# Altium PCB drive.PcbDoc
Units mil, origin at the board's own origin, x right, y up, seen from the top; angles counter-clockwise.
Board outline 6000 x 4000 mil, 2 copper layers (Top Layer, Bottom Layer); 51 components, 40 nets, 164 pads, 61 vias.
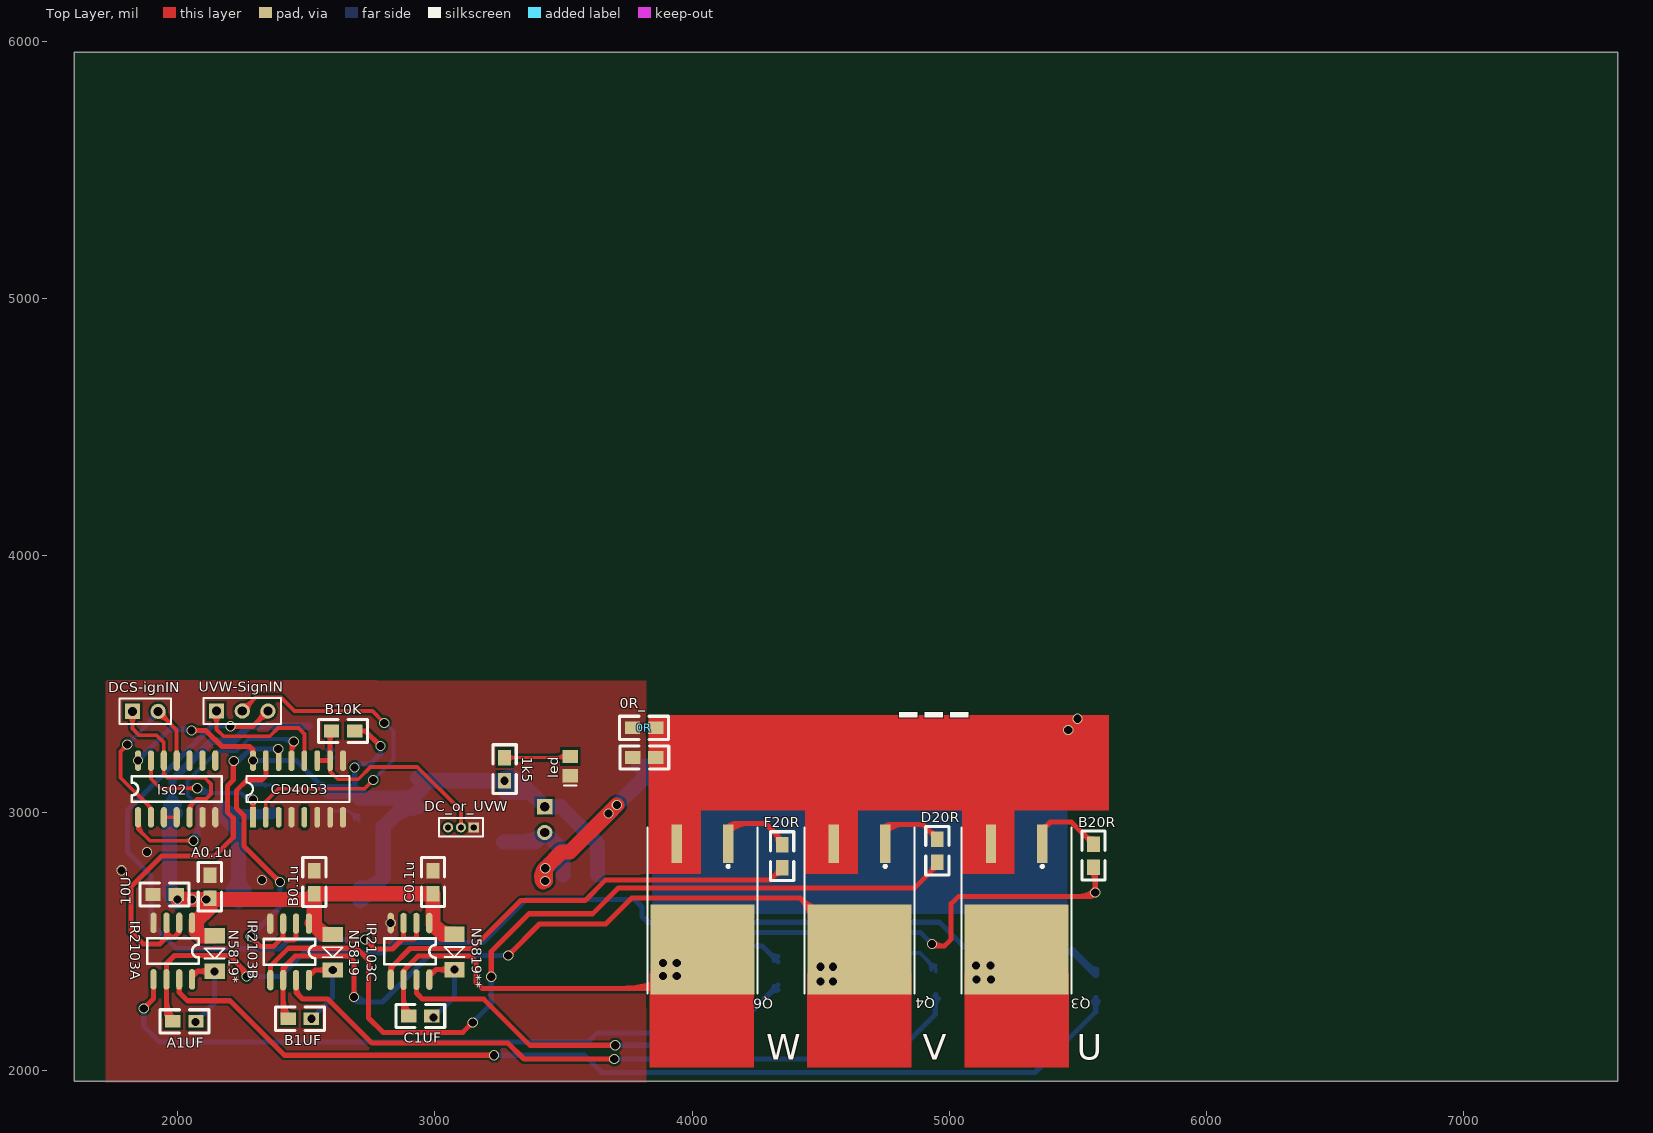
[diagram p0: Top Layer view]
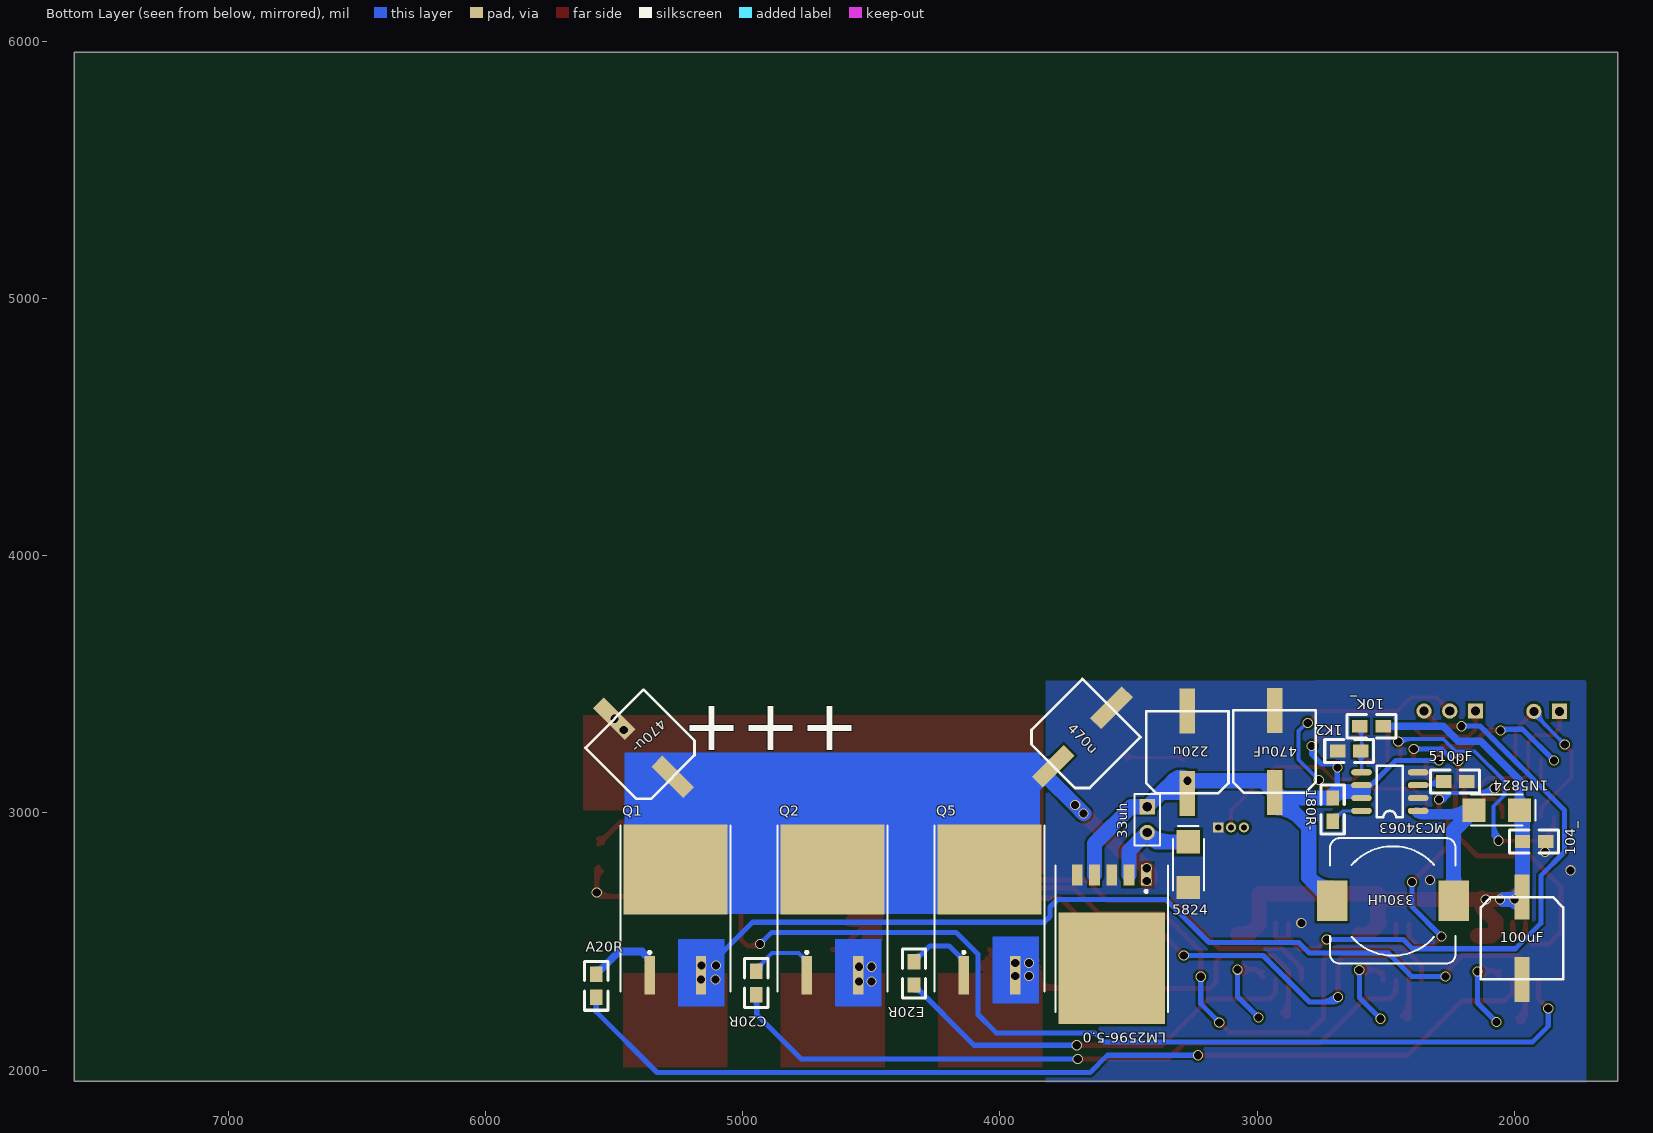
[diagram p1: Bottom Layer view, seen from below]

## Layer stack, top to bottom
Top Layer: signal copper 1.4
Dielectric: dielectric 12.6, FR-4, Dk 4.8
Bottom Layer: signal copper 1.4

## Board outline
1598,1957 7598,1957 7598,5957 1598,5957

## Design rules (kind name [scope] priority, off if disabled: settings)
Clearance [All] p1: gap=10
ComponentClearance [All] p1 off: gap=10 collisioncheckmode=3 verticalgap=10 showdistances=FALSE
PolygonConnect [All] p1: connectstyle=Direct reliefconductorwidth=10 reliefentries=4 polygonreliefangle="90 Angle"
RoutingCorners [All] p1: cornerstyle=Round minsetback=50 maxsetback=100
RoutingVias [All] p1: holewidth=23.62 width=39.37 viastyle="Through Hole" minholewidth=31.5 minwidth=39.37 maxholewidth=39.37 maxwidth=47.24
SilkscreenOverComponentPads [IsPad] p1: minsilkscreentomaskgap=10
SolderMaskExpansion [All] p1: expansion=4
Width [All] p1: maxlimit=196.85 minlimit=11.81 preferedwidth=78.74
Width GND_A [InNet('GND_A')] p2: maxlimit=100 minlimit=30 preferedwidth=30 minimp=50.000000 maximp=50.000000 favimp=50.000000
Width MOTO__1 [InNet('MOTO-')] p3: maxlimit=100 minlimit=20 preferedwidth=78.74 minimp=50.000000 maximp=50.000000 favimp=50.000000
Width MOTO+_1 [InNet('MOTO+')] p4: maxlimit=100 minlimit=20 preferedwidth=78.74 minimp=50.000000 maximp=50.000000 favimp=50.000000
Width 12V [InNet('12V')] p5: maxlimit=78.74 minlimit=15 preferedwidth=47.24
25 further rules are at their usual default settings.

## Components (designator, comment, footprint, x,y, rotation, side; value= is the part's Value field where it differs from the comment)
0R "Res2" 0805 3768,3331 r0 top
0R_ "Res2" 0805 3769,3216 r0 top
1K2 "1K2" 0805 2597,3241 r0 bottom
1k5 "1K5" 0805 3271,3125 r90 top
1N5824 "1N5819" DIODE-SMA 2068,3011 r180 bottom
10K_ "10K" 0805 2510,3337 r0 bottom
10U- "0.1u2" 0805 1994,2683 r180 top
33uh "Header 2" HDR1X2 3427,3024 r270 bottom
100uF "100uF/25V/C" capso_8*10 1970,2513 r90 bottom
104_ "0.1u2" 0805 1968,2889 r180 bottom
180R- "180R" 0805 2706,2968 r90 bottom
220u "Cap" capso_8*10 3271,3236 r270 bottom
330uH "330uH" L-SMD-12 2472,2658 r0 bottom
470u "Cap" capso_8*10 3679,3295 r315 bottom
470u- "CAP 220" capso_8*10 5385,3253 r225 bottom
470uF "470uF/25V/D" capso_8*10 2932,3239 r270 bottom
510pF "510pF" 0805 2185,3122 r0 bottom
5824 "Diode" DIODE-SMA 3267,2799 r90 bottom
A0.1u "0.1u2" 0805 2125,2668 r90 top
A1UF "0.1u2" 0805 1981,2190 r0 top
A20R "R1" 0805 5569,2283 r90 bottom
B0.1u "0.1u2" 0805 2531,2686 r90 top
B1UF "0.1u2" 0805 2430,2200 r0 top
B10K "Res2" 0805 2598,3319 r0 top
B20R "R3" 0805 5560,2789 r90 top
C0.1u "0.1u2" 0805 2992,2686 r90 top
C1UF "0.1u2" 0805 2898,2211 r0 top
C20R "R2" 0805 4947,2384 r270 bottom
CD4053 "Header 8X2A" SOP16 2449,3091 r0 top
D20R "R4" 0805 4953,2898 r270 top
DC_or_UVW "MHDR1X3" MHDR1X3 3151,2944 r180 top
DCS-ignIN "Header 2" HDR1X2 1824,3395 r0 top
E20R "R2" 0805 4334,2421 r270 bottom
F20R "R4" 0805 4350,2877 r270 top
IR2103A "Header 4X2A" SOP8 1981,2458 r270 top
IR2103B "Header 4X2A" SOP8 2435,2455 r270 top
IR2103C "Header 4X2A" SOP8 2903,2457 r270 top
led "LED" LED_0805 3526,3182 r270 top
LM2596-5.0 "LM2596S" TO-263-5 3565,2592 r0 bottom
ls02 "74ls02" SO-14 1846,2983.32 r90 top
MC34063 "MC34063" SOP8 2489,3083 r0 bottom
N5819 "1N5819" D1206 2603,2528 r270 top
N5819* "1N5819" D1206 2144,2523 r270 top
N5819** "1N5819" D1206 3076,2529 r270 top
Q1 "LR7843" TO-263 5261,2574.8 r180 bottom
Q2 "LR7843" TO-263 4650.5,2574.8 r180 bottom
Q3 "LR7843" TO-263 5261,2675 r180 top
Q4 "LR7843" TO-263 4650.5,2675 r180 top
Q5 "LR7843" TO-263 4040,2574.8 r180 bottom
Q6 "LR7843" TO-263 4040,2675 r180 top
UVW-SignIN "Header 3" HDR1X3 2151,3396 r0 top

## Footprints (in the part's own frame and the unit in brackets; to place one, negate y for a bottom-side part, rotate by r counter-clockwise, add the part's x,y. Pads: shape width x height; smd on the part's side, far side on the other; paste and mask are expansions set on the pad)
0805 [mil]
  rect 60x50 smd: 1(0,0) 2(90,0)
  silkscreen extent -50,-45 140,45
capso_8*10 [mil]
  rect 175x60 smd: 1(160,0) 2(-160,0)
  silkscreen extent -160,-160 160,160, body extent -192,-162 198,164, height 402
D1206 [mm]
  rect 1.5x2 smd: 1(0.015,-0.01) 2(3.515,-0.01)
  silkscreen extent 1.26,-1.01 2.26,0.99
DIODE-SMA [mm] "ÌùÆ"
  rect 2.3x2.3 smd: 1(-2.25,0) 2(2.25,0)
  silkscreen extent -2.54,-1.52 3.81,1.52, body extent -2.92,-1.4 2.92,1.4, height 3
HDR1X2 [mm] "Connector; Header; 2 Position"
  rect 1.5x1.5 hole 0.9: 1(0,0)
  round 1.5 hole 0.9: 2(2.54,0)
  silkscreen extent -1.27,-1.27 3.81,1.27
HDR1X3 [mm] "Connector; Header; 3 Position"
  rect 1.5x1.5 hole 0.9: 1(0,0)
  round 1.5 hole 0.9: 2(2.54,0) 3(5.08,0)
  silkscreen extent -1.27,-1.27 6.35,1.27
L-SMD-12 [mm] "ÌùÆ¬µ"
  rect 3x4 smd: 1(-6,0) 2(6,0)
  silkscreen extent -6.2,-6.2 6.2,6.2, body extent -6.21,-6.23 6.21,6.18, height 2.5
LED_0805 [mm]
  rect 1.3x1.5 smd: 1(-0.95,0) 2(0.95,0)
  silkscreen extent 1.91,-0.63 1.91,0.63
MHDR1X3 [mm] "Connector; Header; 3 Position"
  rect 1x1 hole 0.6: 1(0,0)
  round 1 hole 0.6: 2(1.27,0) 3(2.54,0)
  silkscreen extent -0.9,-0.9 3.44,0.9
SO-14 [mil]
  oval 80x24 smd: 1(0,0) 2(0,-50) 3(0,-100) 4(0,-150) 5(0,-200) 6(0,-250) 7(0,-300) 8(220,-300) 9(220,-250) 10(220,-200) 11(220,-150) 12(220,-100) 13(220,-50) 14(220,0)
  silkscreen extent 60,-325 160,25
SOP8 [mil]
  oval 80x24 smd: 1(-115,75) 2(-115,25) 3(-115,-25) 4(-115,-75) 5(105,-75) 6(105,-25) 7(105,25) 8(105,75)
  silkscreen extent -55,-100 45,100, body extent -126,-95 110,97, height 67
SOP16 [mil]
  rect 22x80 smd: 1(-156.57,-107.68)
  oct 22x80 smd: 2(-106.57,-107.68) 3(-56.57,-107.68) 4(-6.57,-107.68) 5(43.43,-107.68) 6(93.43,-107.68) 7(143.43,-107.68) 8(193.43,-107.68) 9(193.43,112.32) 10(143.43,112.32) 11(93.43,112.32) 12(43.43,112.32) 13(-6.57,112.32) 14(-56.57,112.32) 15(-106.57,112.32) 16(-156.57,112.32)
  silkscreen extent -182,-48 218,52
TO-263 [mm] "D2-PAK/TO-263-AB; 3 Leads (1 Cropped); Body 15.9 (inc. leads) x 10."
  rect 1x3.81 smd: 1(-2.54,-5.225) 3(2.54,-5.225)
  rect 10.25x8.9 smd: 4(0,5.225)
  silkscreen extent -5.43,-6.83 5.43,9.57
TO-263-5 [mm]
  rect 1.05x2.1 smd: 1(-3.4,-4.225) 2(-1.7,-4.225) 3(0,-4.225) 4(1.7,-4.225) 5(3.4,-4.225)
  rect 10.5x11 smd: 6(0,4.987)
  silkscreen extent -5.55,-5.18 5.55,9.28, body extent -5.33,-4.7 5.33,10.29, height 3

## Part data
0R 0R_ B10K: "Resistor"
1K2 10K_ 180R- A20R B20R C20R D20R E20R F20R: library part Res2, "Resistor"
1N5824: library part "Diode 1N4007", "1 Amp General Purpose Rectifier"
10U- 104_ 510pF A0.1u A1UF B0.1u B1UF C0.1u C1UF: library part Cap, "Capacitor"
33uh DCS-ignIN: "Header, 2-Pin"
100uF 470uF: library part "Cap Pol1", "Polarized Capacitor (Radial)"
220u 470u: "无极"
330uH: library part "Inductor Iron", "Magnetic-Core Inductor"
5824: "Default Diode"
CD4053: "Header, 8-Pin, Dual row"
DC_or_UVW UVW-SignIN: "Header, 3-Pin"
IR2103A IR2103B IR2103C: "Header, 4-Pin, Dual row"
led: library part L
LM2596-5.0: "NS SIMPLE SWITCHER?Power Converter 150"
MC34063: library part Component_1
N5819 N5819* N5819**: library part "Diode 1N4934", "1 Amp Fast Recovery Recti"
Q1 Q2 Q3 Q4 Q5 Q6: library part NMOS-2, "N-Channel Power MOSFET"

## Via types
v1: diameter 39.37, hole 31.5, Top Layer to Bottom Layer, 61 vias

## Nets (pads, with @x,y where several pads share a name; then routed paths per layer and width w, separated by ;. In a path a pad name is that pad's centre, name@x,y a point inside that pad or via, vN(x,y) a via of type N, cw(c..) or ccw(c..) an arc to the next point about the centre after c; other vN are vias at no path point)
5V: 1k5.1 33uh.1 180R-.2 220u.1 330uH.2 470uF.1 B10K.2 CD4053.16 LM2596-5.0.4 ls02.14 MC34063.6 MC34063.7 | length 3965.4
  Top Layer w20: v1(2054,3321) 2109,3321 2172,3258 2280,3258 2292.43,3245.57 v1(2292.43,3203.32) ; v1@2060.85,3314.15 cw(c2077.38,3297.62) 2077.38,3321 cw(c2077.38,3344.38) v1@2060.85,3327.85 ; 2281.35,3256.65 cw(c2257.02,3232.32) CD4053.16@2291.43,3232.32 ; CD4053.16@2285.58,3210.17 ccw(c2269.04,3226.7) 2292.43,3226.7 ccw(c2315.81,3226.7) CD4053.16@2299.27,3210.17 ; B10K.2@2697,3310 B10K.2 2729,3319 v1(2788,3260)
  Bottom Layer w20: v1(1846,3203.32) 1968.18,3325.5 v1@2049.5,3325.5 ; v1@1846,3213.01 ccw(c1846,3236.39) 1862.53,3219.86 ccw(c1879.07,3203.32) v1@1855.69,3203.32 ; 2019.75,3325.5 cw(c2019.75,3286.75) v1@2047.15,3314.15 ; v1(2292.43,3203.32) 2460.68,3203.32 2581,3083 ; v1@2299.27,3196.47 cw(c2315.81,3179.94) 2315.81,3203.32 cw(c2315.81,3226.7) v1@2299.27,3210.17 ; 2545.51,3118.49 ccw(c2566,3138.97) MC34063.6@2566,3110 ; 180R-.2@2702.46,3059.46 cw(c2737.39,3094.39) 2688,3094.39 v1(2688,3177) 2701,3190 2749,3190 2788,3229 v1(2788,3260)
  Bottom Layer w59.06: 2586,3083 2681,3083 180R-.2 470uF.1@2911,3058 ; 2668.65,3083 cw(c2668.65,3025.65) 180R-.2@2709.2,3066.2 ; 330uH.2 2799,2748.78 2799,2946 470uF.1@2911,3058 ; 330uH.2@2708.22,2707.21 ccw(c2708.22,2826.02) 2792.23,2742.01 ; 2833.03,2980.03 cw(c2932,2881.07) 470uF.1@2932,3021.03 ; 2880.16,3058 ccw(c2880.16,3130.84) 470uF.1@2931.67,3079.33 ; 220u.1@3264.04,3118.04 ccw(c3358.29,3212.29) 3358.29,3079 ; 220u.1@3271.22,3133.08 cw(c3293.17,3092.17) 3326,3125 ; 220u.1@3274,3079 3372,3079 ; LM2596-5.0.4 3631.93,2881.07 3489,3024 33uh.1 3372,3079 ; 470uF.1@2911,3058 470uF.1 2978,3125 v1(3271,3125) 3326,3125 ; 3326,3125 3372,3079 ; 470uF.1@2932.33,3136.83 ccw(c2960.9,3165.4) 2960.9,3125 cw(c2960.9,3165.4) 470uF.1@2932.33,3136.83
12V: 1N5824.2 10K_.1 10U-.1 100uF.1 104_.1 A0.1u.1 B0.1u.1 C0.1u.1 IR2103A.1 IR2103B.1 IR2103C.1 N5819**.1 N5819*.1 N5819.1 | length 3471.8
  Top Layer w59.06: 10U-.1@1995.8,2679.8 ccw(c2033.94,2717.94) 2033.94,2664 ; v1(1999,2664) A0.1u.1@2125,2664 ; 2096.69,2604.69 ccw(c2038.38,2663) A0.1u.1@2120.84,2663 ; 2111.52,2619.52 ccw(c2068.03,2663) A0.1u.1@2129.53,2663 ; A0.1u.1 A0.1u.1@2125,2664 ; N5819*.1@2133.77,2522.43 cw(c2118.66,2586.66) 2072,2540 ; N5819*.1 2089.57,2522.43 2072,2540 ; 2500.89,2664 ccw(c2500.89,2711.11) B0.1u.1@2534.2,2677.8 ; 2549.76,2545.24 ccw(c2592.77,2588.26) N5819.1@2592.77,2527.43 ; N5819.1 2567.57,2527.43 2523,2572 2531,2580 B0.1u.1 ; 3005.69,2553.31 ccw(c3065.77,2613.4) N5819**.1@3065.77,2528.43 ; N5819**.1 3030.57,2528.43 2992,2567 C0.1u.1 B0.1u.1 ; 2072,2540 2072,2580 2125,2633 A0.1u.1@2125,2664 ; A0.1u.1@2125,2664 2509,2664 B0.1u.1
  Bottom Layer w30: 1N5824.2@1958.01,3032.41 ccw(c1906.33,3084.09) 1979.42,3084.09 ccw(c2052.51,3084.09) 1N5824.2@2000.83,3032.41 ; 1N5824.2 1979.42,3127.42 2131,3279 2218,3279 2276,3337 10K_.1
  Bottom Layer w59.06: 100uF.1@1968,2715.08 ccw(c2050.08,2715.08) 100uF.1@1992.04,2657.04 ; 1968,2945.42 cw(c2045,2945.42) 1N5824.2@1990.55,2999.86 ; 1N5824.2 1968,2999.58 104_.1 100uF.1@1968,2695 ; 100uF.1@1995.41,2654.83 cw(c2011.13,2695) 100uF.1@1968,2695 ; v1@2042,2664 v1(1999,2664) 100uF.1@1968,2695
  other v1: 2055,2663 2111,2663
DIR_1: DCS-ignIN.1 ls02.5 ls02.12 | length 835.1
  Top Layer w15: DCS-ignIN.1@1808.42,3379.42 cw(c1770.82,3341.82) 1824,3341.82 cw(c1877.18,3341.82) DCS-ignIN.1@1839.58,3379.42 ; DCS-ignIN.1 1824,3328 1850,3302 1918,3302 1946,3274 ls02.12 1946,3152 1961,3137 2105,3137 2129,3113 2129,3073 2110,3054 2075,3054 2046,3025 ls02.5 ; ls02.5@2050.5,3011.32 cw(c2094.38,3011.32) 2063.35,3042.35
GND_A: 0R.2 0R_.2 470u-.2 Q3.3 Q4.3 Q6.3
  other v1: 5462,3322 5498.14,3366.14
GND_D: 0R.1 0R_.1 1K2.2 10U-.2 100uF.2 104_.2 220u.2 470u.2 470uF.2 510pF.1 5824.1 A0.1u.2 B0.1u.2 C0.1u.2 CD4053.4 CD4053.6 CD4053.7 CD4053.8 CD4053.9 DC_or_UVW.1 IR2103A.4 IR2103B.4 IR2103C.4 led.2 LM2596-5.0.3 LM2596-5.0.5 ls02.6 ls02.7 MC34063.2 MC34063.4
  other v1: 2828,2572 2327,2739 1782,2777 1881,2848
IN_A: CD4053.14 IR2103A.2 IR2103A.3 | length 1666.2
  Top Layer w19.68: IR2103A.3 IR2103A.3@1956,2534 ; IR2103A.3@1958.16,2545 ccw(c1989.92,2545) 1967.46,2522.54 ; 1995.95,2525.95 ccw(c1976.91,2545) IR2103A.2@2003.84,2545 ; IR2103A.2 2006,2536 1987,2517 1973,2517 IR2103A.3@1956,2534 ; 2216,3173.41 cw(c2246.59,3173.41) v1@2224.96,3195.04 ; v1@2216,3202 2216,3127.75 2193,3104.75 2193,3002.25 2216,2979.25 2216,2905 2143,2832 1937,2832 1818,2713 1818,2538 1865,2491 1931,2491 1956,2516 IR2103A.3@1956,2534 ; v1@2384.04,3242.04 cw(c2363.8,3221.8) CD4053.14@2392.43,3221.8 ; CD4053.14 CD4053.14@2392.43,3237.57 ; CD4053.14@2392.43,3228.68 cw(c2411.32,3228.68) CD4053.14@2397.96,3242.04
  Bottom Layer w20: v1(2218,3202) 2234.89,3202 2281.89,3249 v1(2391,3249) ; v1@2384.15,3242.15 ccw(c2367.62,3225.62) 2367.62,3249 ccw(c2367.62,3272.38) v1@2384.15,3255.85
IN_A_1: CD4053.13 ls02.1 | length 1426.1
  Top Layer w15: ls02.1 1846,2938 1892,2892 v1(2062,2892) ; ls02.1@1850.5,2955.32 ccw(c1903.19,2955.32) 1865.93,2918.07 ; v1@2053.38,2883.38 ccw(c2032.58,2862.58) 2032.58,2892 ccw(c2032.58,2921.42) v1@2053.38,2900.62 ; CD4053.13 2442.43,3269.43 v1(2451,3278) ; CD4053.13@2442.43,3227.88 cw(c2501.12,3227.88) v1@2459.62,3269.38
  Bottom Layer w15: v1@2053.38,2900.62 ccw(c1986.71,2967.29) 2081,2967.29 ; v1(2062,2892) 2081,2911 2081,3026 2038,3069 2038,3124 2154,3240 2228,3240 2276,3288 2441,3288 v1(2451,3278) ; v1@2063.99,2890.01 ccw(c2022.93,2931.07) 2081,2931.07 ; 2397.44,3288 cw(c2397.44,3224.44) v1@2442.38,3269.38 ; 2433.65,3288 cw(c2433.65,3260.65) v1@2452.99,3279.99
IN_B: CD4053.15 IR2103B.2 IR2103B.3 | length 1359.2
  Top Layer w19.68: v1@2283,2510.16 cw(c2283,2486.4) 2299.8,2503.2 cw(c2316.6,2520) v1@2292.84,2520 ; v1(2283,2520) 2323,2480 2371,2480 2410,2519 ; CD4053.15 2342.43,3143.43 2328,3129 2271,3129 2228,3086 2228,3019 2258,2989 2258,2871 v1(2398,2731) ; v1@2388.16,2731 ccw(c2364.4,2731) 2381.2,2747.8 ccw(c2398,2764.6) v1@2398,2740.84 ; IR2103B.3 2410,2519 ; IR2103B.2 2460,2514 2452,2506 2419,2506 2410,2515 2410,2519
  Bottom Layer w19.68: v1(2283,2520) 2398,2635 v1(2398,2731) ; v1@2283,2529.84 ccw(c2283,2553.6) 2299.8,2536.8 ccw(c2316.6,2520) v1@2292.84,2520 ; v1@2391.04,2724.04 cw(c2374.24,2707.24) 2398,2707.24 cw(c2421.76,2707.24) v1@2404.96,2724.04
IN_B_1: CD4053.1 ls02.13 | length 876.3
  Top Layer w15: ls02.13 1896,3133 1933,3096 v1(2076,3096) ; v1@2067.38,3087.38 ccw(c2046.58,3066.58) 2046.58,3096 ccw(c2046.58,3125.42) v1@2067.38,3104.62
  Top Layer w20: v1@2285.58,3044.73 cw(c2269.04,3028.19) 2292.43,3028.19 cw(c2315.81,3028.19) v1@2299.27,3044.73 ; CD4053.1 v1(2292.43,3051.57)
  Bottom Layer w15: v1@2074.01,3094.01 ccw(c2112.66,3132.66) 2112.66,3078 ; v1(2076,3096) 2094,3078 2245,3078 ; v1@2084.62,3104.62 ccw(c2148.87,3168.87) 2148.87,3078 ; 2265.49,3057.51 ccw(c2287.61,3079.63) v1@2292.9,3048.8 ; 2271.43,3051.57 2245,3078 ; v1@2290.36,3063.58 cw(c2281.6,3114.6) 2245,3078
  Bottom Layer w20: v1@2285.06,3045.29 ccw(c2271.43,3033.65) 2271.43,3051.57 ; v1@2285.06,3057.86 cw(c2271.43,3069.5) 2271.43,3051.57 ; v1(2292.43,3051.57) 2271.43,3051.57
IN_C: IR2103C.2 IR2103C.3 UVW-SignIN.3 | length 2676.8
  Top Layer w19.68: v1(2205,3337) 2292,3337 UVW-SignIN.3 UVW-SignIN.3@2351,3380 ; v1@2211.96,3330.04 cw(c2228.76,3313.24) 2228.76,3337 cw(c2228.76,3360.76) v1@2211.96,3343.96 ; UVW-SignIN.3@2331.32,3396 cw(c2283.79,3396) 2317.4,3362.4 cw(c2351,3328.79) UVW-SignIN.3@2351,3376.32 ; v1@2729,2498.16 cw(c2729,2474.4) 2745.8,2491.2 cw(c2762.6,2508) v1@2738.84,2508 ; v1(2729,2508) 2766,2471 2835,2471 2878,2514 ; IR2103C.3 2878,2514 ; IR2103C.2 2928,2519 2919,2510 2882,2510 2878,2514
  Bottom Layer w19.68: 2178.82,3338 cw(c2178.82,3310.82) v1@2198.04,3330.04 ; 2183.65,3338 ccw(c2183.65,3358.35) v1@2198.04,3343.96 ; v1@2205,3338 2133,3338 1805,3010 1805,2848 1897,2756 1897,2571 1996,2472 2396,2472 2432,2508 v1(2729,2508) ; UVW-SignIN.3@2351,3379 UVW-SignIN.3 ; v1@2722.04,2501.04 ccw(c2705.24,2484.24) 2705.24,2508 ccw(c2705.24,2531.76) v1@2722.04,2514.96
MOS1: A20R.1 IR2103A.7 | length 4028.7
  Top Layer w19.68: IR2103A.7 2006,2302 2038,2270 2203,2270 2415,2058 v1(3230,2058) ; v1@3223.04,2051.04 ccw(c3206.24,2034.24) 3206.24,2058 ccw(c3206.24,2081.76) v1@3223.04,2064.96
  Bottom Layer w19.68: v1(3230,2058) 3582,2058 3649,1991 5333,1991 5569,2227 A20R.1 ; v1@3236.96,2051.04 cw(c3253.76,2034.24) 3253.76,2058 cw(c3253.76,2081.76) v1@3236.96,2064.96 ; A20R.1@5558.28,2267.28 cw(c5532.41,2241.41) 5569,2241.41 cw(c5605.59,2241.41) A20R.1@5579.72,2267.28
MOS2: B20R.1 IR2103A.5 | length 4854.6
  Top Layer w19.68: v1(1868,2240) 1906,2278 IR2103A.5 ; v1@1868,2249.84 ccw(c1868,2273.6) 1884.8,2256.8 ccw(c1901.6,2240) v1@1877.84,2240 ; v1(4933,2490) 4941,2482 4980,2482 5007,2509 5007,2647 5036,2676 5552,2676 ; v1@4939.96,2496.96 ccw(c4976.08,2533.08) 4976.08,2482 ; 5507.02,2676 ccw(c5507.02,2750.98) 5560.04,2697.96 ccw(c5543.24,2714.76) 5567,2714.76 ccw(c5590.76,2714.76) v1@5573.96,2697.96 ; B20R.1@5549.28,2773.28 cw(c5506.51,2730.51) 5567,2730.51 ; v1@5557.19,2690.18 cw(c5539.32,2688.68) 5552,2676 ; B20R.1 5567,2782 v1(5567,2691) 5552,2676 ; v1@5566.18,2681.19 ccw(c5564.68,2663.32) 5552,2676
  Bottom Layer w19.68: v1@1861.04,2233.04 cw(c1844.24,2216.24) 1868,2216.24 cw(c1891.76,2216.24) v1@1874.96,2233.04 ; v1(1868,2240) 1868,2171 1930,2109 3595,2109 3631,2145 4014,2145 4085,2216 4085,2451 4170,2536 4887,2536 v1(4933,2490) ; v1@4923.16,2490 ccw(c4899.4,2490) 4916.2,2506.8 ccw(c4933,2523.6) v1@4933,2499.84
MOS3: C20R.2 IR2103B.7 | length 2964.9
  Top Layer w19.68: IR2103B.7 2460,2302 2485,2277 2583,2277 2755,2105 3284,2105 3346,2043 v1(3697,2043) ; IR2103B.7@2462.16,2322 ccw(c2515.65,2322) 2477.83,2284.17 ; v1@3690.04,2036.04 ccw(c3673.24,2019.24) 3673.24,2043 ccw(c3673.24,2066.76) v1@3690.04,2049.96
  Bottom Layer w19.68: v1(3697,2043) 4772,2043 4945,2216 4945,2292 C20R.2 ; v1@3703.96,2036.04 cw(c3720.76,2019.24) 3720.76,2043 cw(c3720.76,2066.76) v1@3703.96,2049.96 ; C20R.2@4936.28,2278.28 cw(c4915.23,2257.24) 4945,2257.24 ; 4945,2247.58 cw(c4988.42,2247.58) C20R.2@4957.72,2278.28
MOS4: D20R.2 IR2103B.5 | length 3549.2
  Top Layer w19.68: IR2103B.5 2360,2404 2430,2474 2696,2474 2742,2428 2742,2203 2798,2147 3108,2147 v1(3147,2186) ; v1@3137.16,2186 cw(c3113.4,2186) 3130.2,2169.2 cw(c3147,2152.4) v1@3147,2176.16 ; v1@3212.04,2369.96 ccw(c3195.24,2386.76) 3219,2386.76 ccw(c3242.76,2386.76) v1@3225.96,2369.96 ; v1(3219,2363) 3219,2461 3366,2608 3613,2608 3714,2709 4865,2709 4953,2797 D20R.2 ; 4922.88,2766.88 ccw(c4886.76,2803) D20R.2@4937.84,2803 ; D20R.2@4937.37,2781.37 cw(c4953,2765.73) D20R.2@4953,2787.84
  Bottom Layer w19.68: v1(3147,2186) 3219,2258 v1(3219,2363) ; v1@3147,2195.84 ccw(c3147,2219.6) 3163.8,2202.8 ccw(c3180.6,2186) v1@3156.84,2186 ; v1@3212.04,2356.04 cw(c3195.24,2339.24) 3219,2339.24 cw(c3242.76,2339.24) v1@3225.96,2356.04
MOS5: E20R.2 IR2103C.7 | length 1771.1
  Top Layer w19.68: IR2103C.7 2928,2300 2952,2276 3190,2276 3369,2097 v1(3701,2097) ; v1@3694.04,2090.04 ccw(c3677.24,2073.24) 3677.24,2097 ccw(c3677.24,2120.76) v1@3694.04,2103.96
  Bottom Layer w19.68: v1(3701,2097) 4100,2097 E20R.2 ; v1@3707.96,2090.04 cw(c3724.76,2073.24) 3724.76,2097 cw(c3724.76,2120.76) v1@3707.96,2103.96 ; 4299.59,2296.59 cw(c4334,2262.18) E20R.2@4334,2310.84 ; E20R.2@4311.66,2308.66 ccw(c4294.32,2326) E20R.2@4318.84,2326
MOS6: F20R.2 IR2103C.5 | length 1824.8
  Top Layer w19.68: IR2103C.5 2828,2398 2903,2473 3147,2473 3333,2659 3583,2659 3664,2740 4303,2740 F20R.2 ; IR2103C.5@2830.16,2380 cw(c2878.82,2380) 2844.41,2414.41 ; 4315.59,2752.59 cw(c4350,2718.18) F20R.2@4350,2766.84 ; F20R.2@4327.66,2764.66 ccw(c4310.32,2782) F20R.2@4334.84,2782
MOTO+: A1UF.1 IR2103A.6 Q1.3 Q3.4 | length 4046.1
  Top Layer w20: 1956,2226.21 ccw(c2012.21,2226.21) A1UF.1@1972.46,2186.46 ; 1956,2274.5 ccw(c2060.5,2274.5) A1UF.1@1986.61,2200.61 ; A1UF.1 1956,2215 IR2103A.6 1956,2415 1987,2446 2201,2446 2268,2379 v1(2268,2364) ; 2240.86,2406.14 cw(c2198.72,2364) v1@2258.32,2364
  Bottom Layer w20: v1(2268,2364) 2399,2364 2490,2455 2797,2455 2838,2496 3187,2496 3355,2664 3775,2664 3805,2634 3805,2597 3827,2575 4961,2575 5104,2432 v1(5104,2407) ; v1@2274.85,2357.15 cw(c2291.38,2340.62) 2291.38,2364 cw(c2291.38,2387.38) v1@2274.85,2370.85 ; 5069.79,2466.21 cw(c5010.58,2407) v1@5094.32,2407 ; v1@5097.15,2413.85 ccw(c5080.62,2430.38) 5104,2430.38 ccw(c5127.38,2430.38) v1@5110.85,2413.85 ; 5103.93,2432.07 cw(c5078.86,2407) v1@5114.31,2407
  other v1: 5106,2353 5161,2353 5160,2407
MOTO-: B1UF.1 IR2103B.6 Q2.3 Q4.4 | length 4338.7
  Top Layer w20: B1UF.1@2410,2200 IR2103B.6 2410,2397 2457.16,2444.16 2663.84,2444.16 2686,2422 v1(2686,2284) ; B1UF.1@2410,2224.14 ccw(c2449.14,2224.14) B1UF.1@2421.46,2196.46 ; 2410,2272.43 ccw(c2497.43,2272.43) B1UF.1@2435.61,2210.61 ; IR2103B.6@2412,2378 cw(c2462.7,2378) 2426.85,2413.85 ; v1@2679.15,2290.85 ccw(c2662.62,2307.38) 2686,2307.38 ccw(c2709.38,2307.38) v1@2692.85,2290.85 ; v1(3285,2446) 3407,2568 3664,2568 3765,2669 4420,2669 ; v1@3285,2455.68 ccw(c3285,2479.07) 3301.53,2462.53 ccw(c3318.07,2446) v1@3294.68,2446 ; 4444.01,2644.99 ccw(c4544.6,2745.59) Q4.4@4583.86,2608.85 ; 4444.89,2644.11 cw(c4341.64,2540.86) Q4.4@4483.18,2504.97 ; Q4.4@4463.79,2509.89 ccw(c4301.94,2550.92) 4420.01,2668.99 ; Q4.4@4468.01,2620.99 ccw(c4555.31,2708.29) Q4.4@4589.38,2589.63 ; Q4.4@4469.77,2619.23 cw(c4381.34,2530.79) Q4.4@4502.57,2500.06 ; Q4.4@4492.01,2596.99 ccw(c4566.01,2671) Q4.4@4594.9,2570.4 ; Q4.4@4494.65,2594.35 cw(c4421.04,2520.73) Q4.4@4521.95,2495.14 ; Q4.4@4578.34,2628.07 cw(c4533.89,2782.88) 4420.01,2668.99 ; Q4.4 4619.71,2469.29 4420,2669
  Bottom Layer w20: v1@2678.71,2276.71 ccw(c2706.97,2304.97) 2706.97,2265 ; v1(2686,2284) 2705,2265 2796,2265 2977,2446 v1(3285,2446) ; v1@2692.85,2290.85 ccw(c2755.25,2353.25) 2755.25,2265 ; v1@3278.15,2439.15 ccw(c3261.62,2422.62) 3261.62,2446 ccw(c3261.62,2469.38) v1@3278.15,2452.85
  other v1: 4499,2345 4548,2345 4499,2402 4548,2402
MOTO-W: C1UF.1 IR2103C.6 Q5.3 Q6.4 | length 4455.6
  Top Layer w19.68: C1UF.1@2878,2211 IR2103C.6 2878,2387 2934.32,2443.32 3138.68,2443.32 3160,2422 3160,2341 3183,2318 3888.71,2318 Q6.4 ; 2878,2236.28 ccw(c2918.28,2236.28) C1UF.1@2889.8,2207.8 ; 2878,2283.81 ccw(c2965.81,2283.81) C1UF.1@2903.72,2221.72 ; IR2103C.6@2880.16,2380 cw(c2902.27,2380) 2886.63,2395.63 ; 3724.21,2318 ccw(c3724.21,2758.5) Q6.4@4035.7,2447.02 ; 3771.74,2318 ccw(c3771.74,2710.98) Q6.4@4049.62,2433.1 ; 3819.26,2318 ccw(c3819.26,2663.46) Q6.4@4063.53,2419.18 ; 3831.74,2332.01 ccw(c3808.02,2406.2) Q6.4@3877.25,2370.51 ; Q6.4@3846.28,2382.81 ccw(c3816.72,2437.9) Q6.4@3876.58,2419.84 ; Q6.4@3847.12,2402.65 cw(c3871.14,2361.19) Q6.4@3883.47,2407.49 ; Q6.4@3852.68,2425.99 cw(c3871.45,2395.53) Q6.4@3891.52,2425.15 ; Q6.4@3862.32,2356.25 ccw(c3853.01,2380.92) Q6.4@3877.03,2370.05 ; Q6.4@3865.76,2357.55 cw(c3873.23,2337.75) Q6.4@3881.95,2357.03 ; Q6.4@3866.78,2318 ccw(c3866.78,2615.93) Q6.4@4077.45,2405.26 ; Q6.4@3867.63,2374.75 cw(c3879.11,2348.77) Q6.4@3889.66,2375.14 ; Q6.4@3876.18,2416.38 cw(c3920.6,2419.19) Q6.4@3893.93,2454.83 ; Q6.4@3876.43,2368.29 cw(c3904.88,2361.49) Q6.4@3889.56,2386.41 ; Q6.4@3877,2346.48 ccw(c3867.76,2375.4) Q6.4@3894.75,2361.49 ; Q6.4@3877.66,2399.23 cw(c3916.34,2339.75) Q6.4@3937.12,2407.59 ; Q6.4@3882.87,2356.67 ccw(c3892.43,2385.19) Q6.4@3906.2,2358.45 ; Q6.4@3883.68,2364.96 cw(c3903.86,2324.71) Q6.4@3933.52,2358.59 ; Q6.4@3887.58,2426.72 ccw(c3897.47,2487.71) Q6.4@3933.61,2437.58 ; Q6.4@3888.52,2375.51 ccw(c3895.24,2400.93) Q6.4@3908.46,2378.2 ; Q6.4@3889.13,2375.33 ccw(c3913.09,2446.89) Q6.4@3947.66,2379.8 ; Q6.4@3890.81,2367.37 ccw(c3847.71,2441.33) Q6.4@3930.48,2419.51 ; Q6.4@3895.51,2363.48 cw(c3916.04,2358.05) Q6.4@3905.37,2376.4 ; Q6.4@3895.57,2363.71 cw(c3970.25,2345.89) Q6.4@3930.05,2411.3 ; Q6.4@3895.76,2415.7 cw(c3942.01,2409.56) Q6.4@3913.65,2446.61 ; Q6.4@3895.82,2417.62 cw(c3964.01,2421.95) Q6.4@3923.06,2476.64 ; Q6.4@3898.12,2355.79 cw(c3918.53,2310) Q6.4@3936.48,2356.81 ; Q6.4@3899.06,2341.39 ccw(c3880.27,2394.51) Q6.4@3931.12,2370.24 ; Q6.4@3909.86,2378.09 cw(c3924.69,2348.51) Q6.4@3946.48,2373.41 ; Q6.4@3913.01,2422.21 cw(c3932.44,2392.32) Q6.4@3942.88,2426.41 ; Q6.4@3915.79,2396.22 cw(c3941.23,2372.14) Q6.4@3940.27,2407.16 ; Q6.4@3915.91,2332.9 ccw(c3897.69,2386.99) Q6.4@3948.82,2361.63 ; Q6.4@3917.58,2346.87 cw(c3940,2324.45) Q6.4@3940,2356.16 ; Q6.4@3918.6,2404.58 cw(c3931.57,2383.05) Q6.4@3937.63,2407.45 ; Q6.4@3920.27,2405.59 ccw(c3908.72,2424.76) Q6.4@3930.45,2419.37 ; Q6.4@3930.16,2366.26 cw(c3976.08,2365.06) Q6.4@3950.49,2403.21 ; Q6.4@3930.2,2417.91 cw(c3972.05,2414.02) Q6.4@3945.21,2446.37 ; Q6.4@3931.87,2391.3 ccw(c3912.7,2424.2) Q6.4@3949.52,2414.49 ; Q6.4@3933.7,2358.44 ccw(c3955.54,2384.65) Q6.4@3971.94,2354.73 ; Q6.4@3938.52,2407.27 ccw(c3944.02,2443.43) Q6.4@3966.7,2414.74 ; Q6.4@3940.86,2426.8 ccw(c3942.85,2449.44) Q6.4@3957.45,2432.03 ; Q6.4@3941.48,2426.73 ccw(c3953.32,2504.71) Q6.4@4002.24,2442.84 ; Q6.4@3942.33,2375.56 ccw(c3955,2427.53) Q6.4@3982.79,2381.82 ; Q6.4@3946.3,2373.56 ccw(c3975.42,2408.5) Q6.4@3997.28,2368.62 ; Q6.4@3949.68,2364.22 cw(c3996.53,2355.62) Q6.4@3969.49,2394.83 ; Q6.4@3949.8,2416.09 cw(c4038.97,2407.8) Q6.4@3981.78,2476.71 ; Q6.4@3949.8,2416.14 cw(c3974.51,2413.97) Q6.4@3958.57,2432.97 ; Q6.4@3949.84,2366 cw(c3981.55,2366) Q6.4@3959.13,2388.42
  other v1: 3886,2366 3940,2366 3886,2417 3940,2417
Net1K2_1: 1K2.1 10K_.2 MC34063.5 | length 421.5
  Bottom Layer w11.81: 1K2.1@2578.5,3243.5 ccw(c2541.07,3280.93) 2594,3280.93 ; 1K2.1@2579,3222 cw(c2567.09,3197.52) 2592.21,3187.02 ; 10K_.2@2581.5,3323.5 cw(c2551.32,3293.32) 2594,3293.32 ; MC34063.5@2589.69,3162.31 ccw(c2579.29,3172.71) 2594,3172.71 ccw(c2608.71,3172.71) MC34063.5@2598.31,3162.31 ; MC34063.5 2594,3331 10K_.2 ; 2594,3188.73 cw(c2633.27,3188.73) 1K2.1@2605.5,3216.5 ; 2594,3271.27 ccw(c2633.27,3271.27) 1K2.1@2605.5,3243.5 ; 2594,3288.49 cw(c2643.51,3288.49) 10K_.2@2608.5,3323.5
Net1k5_2: 1k5.2 led.1 | length 424.4
  Top Layer w11.81: 1k5.2 led.1@3521.6,3215 ; 1k5.2@3284.5,3201.5 cw(c3317.1,3168.9) 3317.1,3215 cw(c3317.1,3261.1) 1k5.2@3284.5,3228.5 ; 3463.91,3215 ccw(c3463.91,3277.55) led.1@3508.14,3233.32 ; 3485.17,3215 cw(c3485.17,3182.51) led.1@3508.14,3205.48 ; 3492.43,3215 ccw(c3492.43,3249.04) led.1@3516.5,3224.97
Net1N5824_1: 1N5824.1 330uH.1 MC34063.1 | length 836.6
  Bottom Layer w39.37: 1N5824.1 2172.58,2995 2361,2995 ; 1N5824.1@2174.68,3029.1 ccw(c2256.99,3111.41) 2256.99,2995 ; 2333.17,2995 ccw(c2333.17,3020.83) MC34063.1@2351.43,3002.57 ; 2361.17,2995 ccw(c2361.17,3020.83) MC34063.1@2379.43,3002.57
  Bottom Layer w59.06: 1N5824.1@2159.58,3008 2235.78,2931.8 330uH.1 ; 330uH.1@2214.9,2698.56 ccw(c2164.49,2748.97) 2235.78,2748.97 ccw(c2307.07,2748.97) 330uH.1@2256.66,2698.56
Net33uh_2: 33uh.2 5824.2 LM2596-5.0.2 | length 467.8
  Bottom Layer w59.06: 5824.2 3390.58,2887.58 33uh.2 ; 3339.08,2887.58 ccw(c3339.08,3011.92) 33uh.2 ; LM2596-5.0.2 3498.07,2852.93 33uh.2
Net180R-_1: 180R-.1 MC34063.8 | length 244.7
  Bottom Layer w11.81: MC34063.8 2666,3008 ; MC34063.8@2626.31,3003.69 cw(c2636.71,2993.29) 2636.71,3008 cw(c2636.71,3022.71) MC34063.8@2626.31,3012.31 ; 2676.94,2997.06 cw(c2652.88,2973) 180R-.1@2686.91,2973 ; 180R-.1@2685.57,2988.43 ccw(c2705.25,3008.11) 180R-.1@2705.84,2980.28 ; 180R-.1@2705.59,2992.09 cw(c2704.44,3046.43) 2666,3008 ; 180R-.1 2666,3008
Net510pF_2: 510pF.2 MC34063.3 | length 296.9
  Bottom Layer w11.81: 510pF.2@2263,3129 2284,3108 MC34063.3 ; 510pF.2@2276.8,3118.8 ccw(c2302.87,3144.87) 510pF.2@2302.87,3108 ; 510pF.2@2285.15,3127.15 ccw(c2331.38,3173.38) 2331.38,3108 ; 510pF.2@2293.5,3135.5 ccw(c2359.9,3201.9) MC34063.3@2359.9,3108 ; MC34063.3@2341.69,3103.69 ccw(c2331.29,3093.29) 2331.29,3108 ccw(c2331.29,3122.71) MC34063.3@2341.69,3112.31
NetA1UF_2: A1UF.2 IR2103A.8 N5819*.2 | length 527.9
  Top Layer w19.68: IR2103A.8@2057.24,2382.77 ccw(c2066.82,2396.43) 2078.63,2384.63 ; IR2103A.8@2060,2366 2078.63,2384.63 ; N5819*.2@2115.3,2384.63 cw(c2115.3,2355.3) N5819*.2@2136.04,2376.04 ; N5819*.2@2119.85,2370.71 ccw(c2086.25,2337.11) 2086.25,2384.63 ccw(c2086.25,2432.15) N5819*.2@2119.85,2398.55 ; N5819*.2@2123.17,2384.63 ccw(c2123.17,2402.83) N5819*.2@2136.04,2389.96 ; N5819*.2 2078.63,2384.63
  Bottom Layer w19.68: v1(2069,2187) 2143,2261 v1(2143,2383) ; v1@2069,2196.84 ccw(c2069,2220.6) 2085.8,2203.8 ccw(c2102.6,2187) v1@2078.84,2187 ; v1@2136.04,2376.04 cw(c2119.24,2359.24) 2143,2359.24 cw(c2166.76,2359.24) v1@2149.96,2376.04
NetA20R_2: A20R.2 Q1.1 | length 368.6
  Bottom Layer w30: Q1.1 5361,2431 5391,2461 5481,2461 A20R.2 ; Q1.1@5365.69,2424.41 cw(c5392.91,2424.41) Q1.1@5373.66,2443.66 ; 5543.39,2398.61 ccw(c5569,2424.21) A20R.2@5569,2388
NetB1UF_2: B1UF.2 IR2103B.8 N5819.2 | length 558.2
  Top Layer w19.68: IR2103B.8@2508,2348 IR2103B.8 2510,2365 2534.63,2389.63 ; IR2103B.8@2510.1,2380.15 ccw(c2511.67,2412.59) 2534.63,2389.63 ; N5819.2@2578.85,2375.71 ccw(c2545.25,2342.11) 2545.25,2389.63 ccw(c2545.25,2437.15) N5819.2@2578.85,2403.55 ; N5819.2@2595.65,2382.67 ccw(c2578.85,2365.87) 2578.85,2389.63 ccw(c2578.85,2413.39) N5819.2@2595.65,2396.59 ; v1(2602.61,2389.63) 2534.63,2389.63
  Bottom Layer w19.68: v1(2520,2200) 2602.61,2282.61 v1(2602.61,2389.63) ; v1@2520,2209.84 ccw(c2520,2233.6) 2536.8,2216.8 ccw(c2553.6,2200) v1@2529.84,2200 ; v1@2595.65,2382.67 cw(c2578.85,2365.87) 2602.61,2365.87 cw(c2626.38,2365.87) v1@2609.57,2382.67
NetB20R_2: B20R.2 Q3.1 | length 382
  Top Layer w19.68: Q3.1 5361,2933 5393,2965 5474,2965 B20R.2 ; Q3.1@5361,2945.87 ccw(c5361,2976.93) 5382.96,2954.96 ; 5525.59,2913.41 ccw(c5560,2947.82) B20R.2@5560,2899.16 ; B20R.2@5537.66,2901.34 cw(c5520.32,2884) B20R.2@5544.84,2884
NetC1UF_2: C1UF.2 IR2103C.8 N5819**.2 | length 547.2
  Top Layer w19.68: IR2103C.8@2975.21,2362.7 ccw(c2975.61,2365.2) IR2103C.8@2977.41,2363.41 ; IR2103C.8@2977,2363 3004.63,2390.63 ; IR2103C.8@2978.34,2382.13 ccw(c2983.18,2412.08) 3004.63,2390.63 ; N5819**.2@3051.85,2376.71 ccw(c3018.25,2343.11) 3018.25,2390.63 ccw(c3018.25,2438.15) N5819**.2@3051.85,2404.55 ; N5819**.2@3068.65,2383.67 ccw(c3051.85,2366.87) 3051.85,2390.63 ccw(c3051.85,2414.39) N5819**.2@3068.65,2397.59 ; v1(3075.61,2390.63) 3004.63,2390.63
  Bottom Layer w19.68: v1(2994,2205) 3075.61,2286.61 v1(3075.61,2390.63) ; v1@2994,2214.84 ccw(c2994,2238.6) 3010.8,2221.8 ccw(c3027.6,2205) v1@3003.84,2205 ; v1@3068.65,2383.67 cw(c3051.85,2366.87) 3075.61,2366.87 cw(c3099.38,2366.87) v1@3082.57,2383.67
NetC20R_1: C20R.1 Q2.1 | length 413.2
  Bottom Layer w15: Q2.1 4750.5,2424.5 4782,2456 4885,2456 4947,2394 C20R.1 ; Q2.1@4750.5,2436.59 ccw(c4750.5,2465.79) 4771.15,2445.15 ; Q2.1@4762.69,2424.41 cw(c4792.32,2424.41) 4771.37,2445.37 ; 4913.59,2427.41 cw(c4875.18,2389) C20R.1@4929.5,2389 ; 4925.66,2415.34 ccw(c4947,2436.68) C20R.1@4947,2406.5
NetD20R_1: D20R.1 Q4.1 | length 471.3
  Top Layer w19.68: Q4.1@4743.54,2942.98 cw(c4772.55,2913.97) 4772.55,2955 ; Q4.1 4750.5,2932.5 4773,2955 ; Q4.1@4750.61,2945.87 ccw(c4750.94,2977.05) 4773,2955 ; Q4.1@4757.46,2929.06 cw(c4820.08,2866.45) 4820.08,2955 ; 4918.59,2932.41 ccw(c4953,2966.82) D20R.1@4953,2918.16 ; D20R.1@4930.66,2920.34 cw(c4913.32,2903) D20R.1@4937.84,2903 ; D20R.1 4896,2955 4773,2955
NetE20R_1: E20R.1 Q5.1 | length 395
  Bottom Layer w19.68: Q5.1 4140,2426 4197,2483 4272,2483 E20R.1 ; Q5.1@4140,2434.25 ccw(c4140,2454.17) Q5.1@4154.09,2440.09 ; Q5.1@4149.84,2424.41 cw(c4177.44,2424.41) Q5.1@4157.93,2443.93 ; 4299.59,2455.41 ccw(c4334,2489.82) E20R.1@4334,2441.16 ; E20R.1@4311.66,2443.34 cw(c4294.32,2426) E20R.1@4318.84,2426
NetF20R_1: F20R.1 Q6.1 | length 531.4
  Top Layer w19.68: Q6.1@4133.04,2942.98 cw(c4171.71,2904.32) 4171.71,2959 ; Q6.1 4140,2937 4162,2959 4285,2959 4350,2894 F20R.1 ; Q6.1@4140,2945.87 ccw(c4140,2967.27) Q6.1@4155.14,2952.14 ; Q6.1@4146.96,2929.06 cw(c4219.23,2856.79) 4219.23,2959 ; Q6.1@4149.84,2936.02 cw(c4175.96,2936.02) Q6.1@4157.49,2954.49 ; 4315.64,2928.36 cw(c4269.28,2882) F20R.1@4334.84,2882
Netls02_3: ls02.3 ls02.4 | length 50
  Top Layer w15: ls02.3 ls02.4
POWER: 470u-.1 470u.1 LM2596-5.0.1 Q1.4 Q2.4 Q5.4 | length 1039.2
  Top Layer w59.06: v1@3419.16,2736 cw(c3513.69,2736) 3446.85,2802.85 ; v1@3420.17,2731.65 cw(c3461.84,2752.16) v1(3429,2785) ; v1(3429,2736) v1(3429,2785) ; v1(3707,3031) v1(3674,2998) 3524,2848 3492,2848 v1(3429,2785)
  Bottom Layer w59.06: v1(3674,2998) v1(3707,3031) 3814,3138 470u.1@3836,3138 ; 3868,3203 3846.86,3181.86 470u.1 470u.1@3836,3138 ; 3915,3059 470u.1@3836,3138
PWM_1: DCS-ignIN.2 ls02.2 ls02.11 | length 1055.5
  Top Layer w15: v1@1791.82,3266 cw(c1762.4,3266) 1783.2,3245.2 cw(c1804,3224.4) v1@1804,3253.82 ; v1(1804,3266) 1778,3240 1778,3137 1896,3019 ls02.2 ; 1882.89,3032.11 cw(c1862.1,3011.32) ls02.2@1891.5,3011.32 ; DCS-ignIN.2@1924,3372.97 cw(c1924,3319.79) 1961.6,3357.4 cw(c1999.21,3395) DCS-ignIN.2@1946.03,3395 ; DCS-ignIN.2 1996,3323 ls02.11
  Bottom Layer w15: v1(1804,3266) 1924,3386 DCS-ignIN.2 ; v1@1804,3278.18 ccw(c1804,3307.6) 1824.8,3286.8 ccw(c1845.6,3266) v1@1816.18,3266 ; 1880.03,3342.03 ccw(c1827.07,3395) DCS-ignIN.2@1901.97,3395 ; 1901.76,3363.76 cw(c1924,3341.52) DCS-ignIN.2@1924,3372.97 ; 1905.64,3367.64 ccw(c1878.28,3395) DCS-ignIN.2@1916.97,3395
TRL: B10K.1 CD4053.10 CD4053.11 DC_or_UVW.2 | length 944.3
  Top Layer w15: CD4053.10 2592.43,3160.57 2622,3131 2702,3131 2750,3179 2931,3179 3101,3009 DC_or_UVW.2
  Top Layer w19.68: CD4053.11 CD4053.10 2592.43,3313.43 B10K.1 ; B10K.1@2582.28,3308.28 cw(c2557.79,3283.79) 2592.43,3283.79 ; 2592.43,3281.02 cw(c2630.98,3281.02) B10K.1@2603.72,3308.28
U: CD4053.12 UVW-SignIN.1 | length 633.9
  Top Layer w15: UVW-SignIN.1@2135.42,3380.42 cw(c2097.82,3342.82) 2151,3342.82 cw(c2204.18,3342.82) UVW-SignIN.1@2166.58,3380.42 ; UVW-SignIN.1 2151,3325 2178,3298 2358,3298 2390,3330 2470,3330 2492.43,3307.57 2492.43,3268.57 CD4053.12
V: CD4053.2 UVW-SignIN.2 | length 1480.6
  Top Layer w15: UVW-SignIN.2 2305,3450 2400,3450 2454,3396 2757,3396 v1(2803,3350) ; UVW-SignIN.2@2251,3418.03 ccw(c2251,3471.21) 2288.6,3433.6 ccw(c2326.21,3396) UVW-SignIN.2@2273.03,3396 ; CD4053.2 2342.43,3044.43 2392,3094 2726,3094 v1(2760,3128)
  Bottom Layer w15: v1(2760,3128) 2839,3207 2839,3318 v1@2807,3350
pads on no net: CD4053.3 CD4053.5 DC_or_UVW.3 LM2596-5.0.6 ls02.8 ls02.9 ls02.10

## Polygon pours and split planes (outlines as drawn)
GND_D on Bottom Layer "Top Layer-No Net" (solid, remove dead copper, pour order 4): 1719.85,3517.47 1719.85,1952.47 3818.85,1952.47 3821.85,1952.47 3821.85,3514.47
GND_D on Top Layer "Top Layer-No Net" (solid, remove dead copper, pour order 3): 1719.85,3517.47 1719.85,1952.47 3818.85,1952.47 3821.85,1952.47 3821.85,3514.47

## Other copper
Top Layer:
  rectangle net GND_A: 3830,3009 5621,3381
  rectangle net GND_A: 3830,2763 4035,3302
  rectangle net GND_A: 4439,2763 4644,3302
  rectangle net GND_A: 5048,2763 5253,3302
  rectangle net MOTO-W: 3835,2010 4241,2377
  rectangle net MOTO-: 4446.5,2010 4852.5,2377
  rectangle net MOTO+: 5058,2010 5464,2377
Bottom Layer:
  rectangle net POWER: 3843,2608 5460,3235
  rectangle net MOTO-W: 3848,2259 4029,2520
  rectangle net MOTO-: 4459.5,2248.09 4640.5,2509.09
  rectangle net MOTO+: 5070,2248.09 5251,2509.09

## Silkscreen, mask and mechanical layers (free items; w line width, h text height)
Top Overlay:
  text "---" at 4792,3306 h200
  text "W" at 4288,2041 h100
  text "V" at 4896.5,2041 h100
  text "U" at 5496,2041 h100
Bottom Overlay:
  text "+++" at 4547,3244 h200
Top Solder:
  rectangle: 3830,3009 5621,3381
  rectangle: 3830,2763 4035,3302
  rectangle: 4439,2763 4644,3302
  rectangle: 5048,2763 5253,3302
  rectangle: 3835,2010 4241,2377
  rectangle: 4446.5,2010 4852.5,2377
  rectangle: 5058,2010 5464,2377
Bottom Solder:
  rectangle: 3843,2608 5460,3235
  rectangle: 3848,2259 4029,2520
  rectangle: 4459.5,2248.09 4640.5,2509.09
  rectangle: 5070,2248.09 5251,2509.09